# EAGLE board Ploughmeter 3.1 (EAGLE 9.6.2)
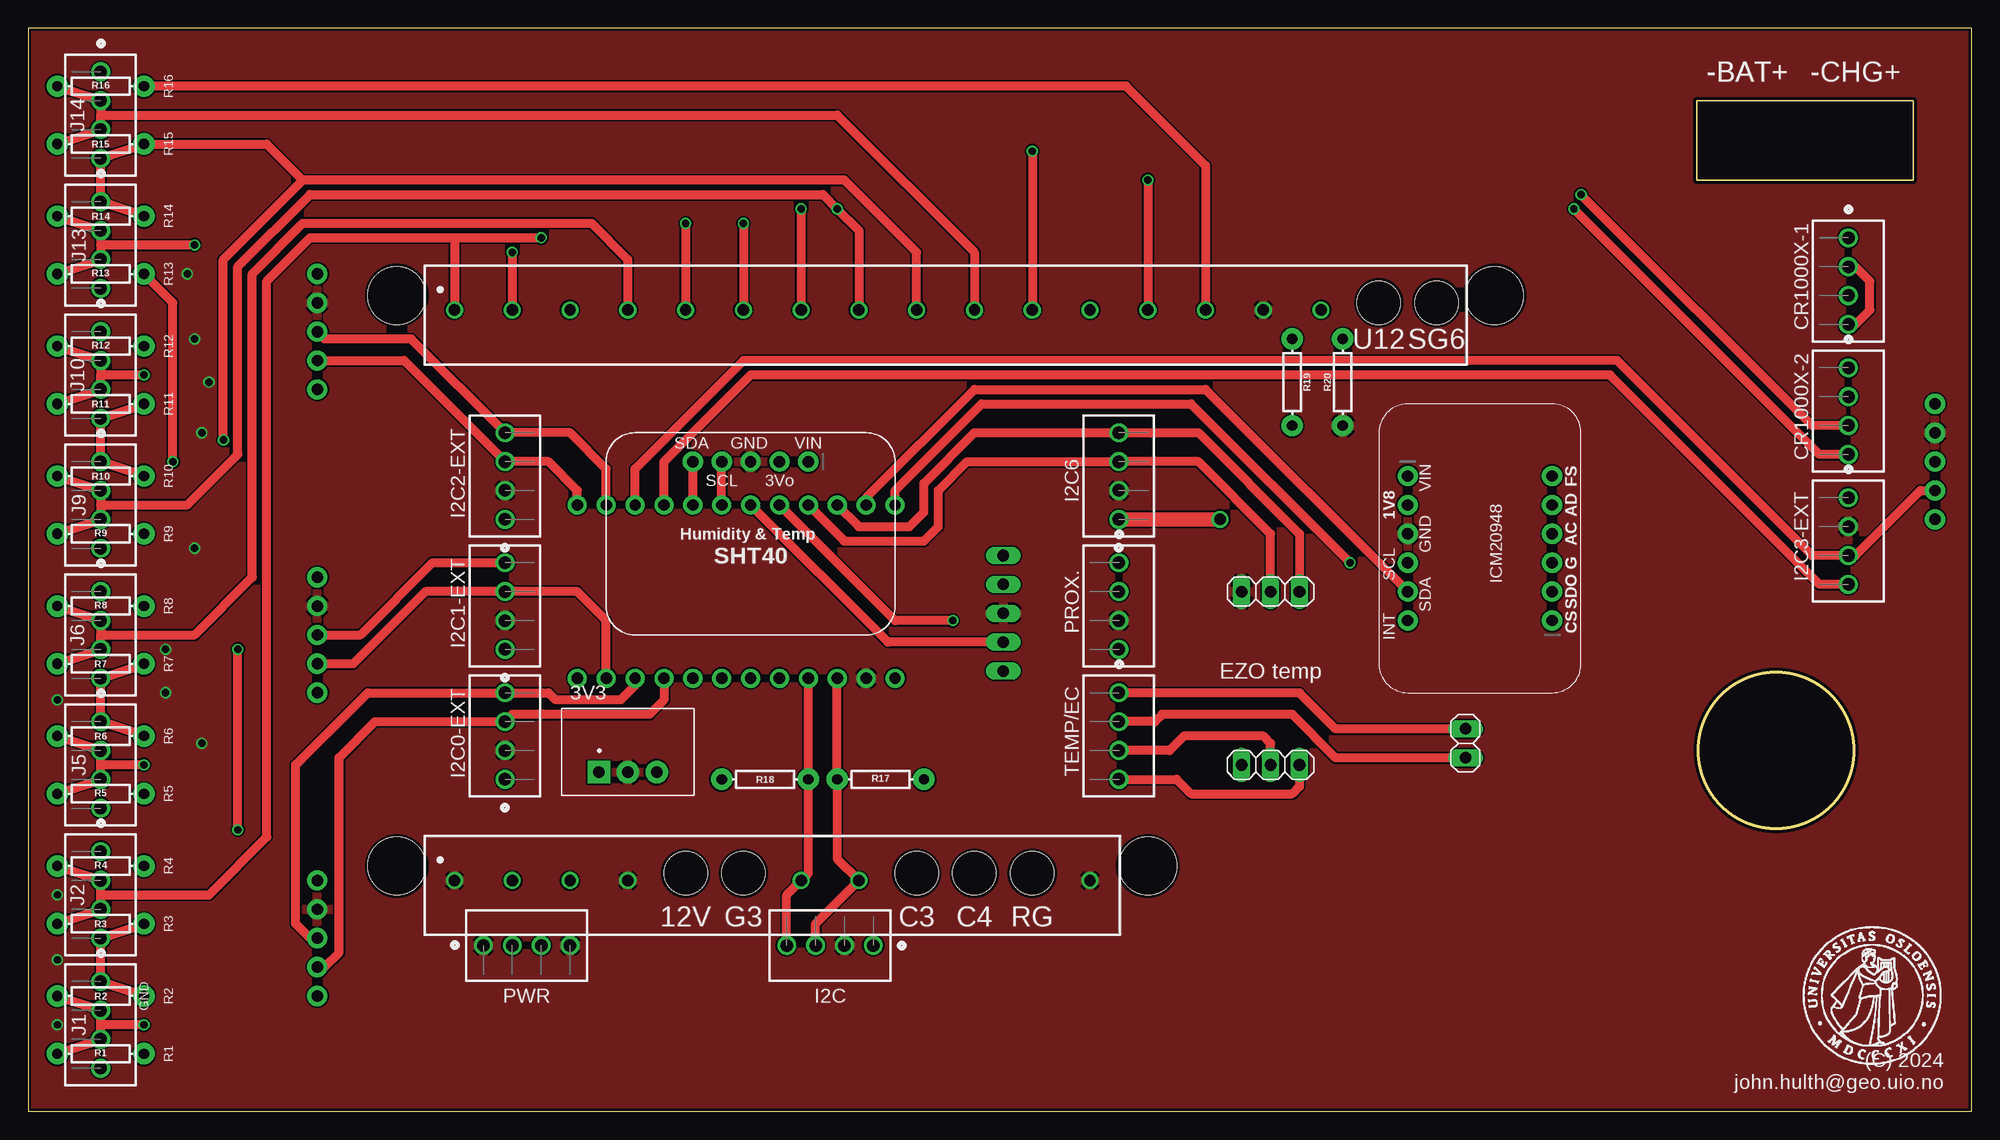
[diagram p0: board, top side]
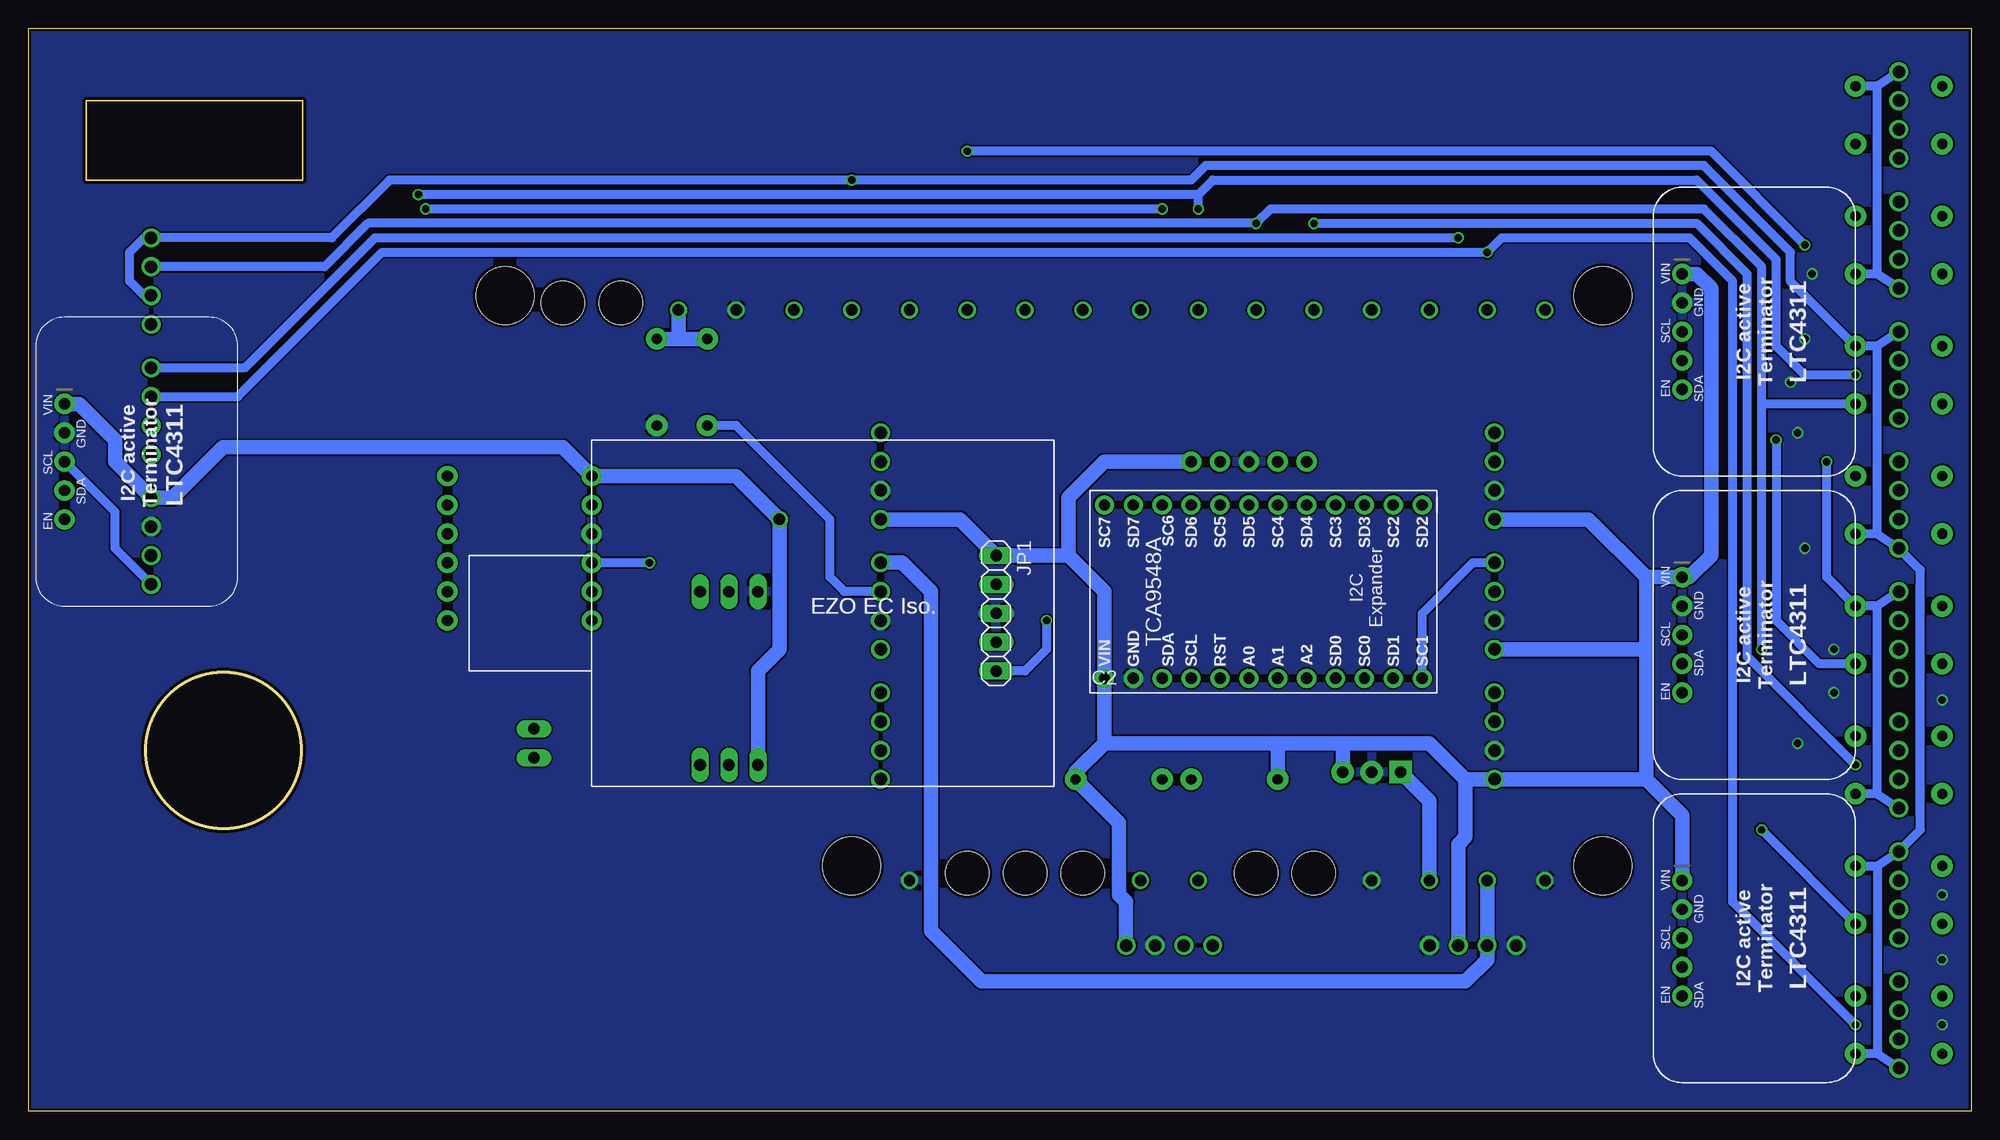
[diagram p1: board, bottom side, seen from below]

Size 170.81 x 95.25 mm. Coordinates in mm from the lower left corner, seen from the top.
Outline: 0,0 170.81,0 170.81,95.25 0,95.25 0,0
Outline: 146.69,88.9 165.74,88.9 165.74,81.92 146.69,81.92 146.69,88.9
Outline: circle at 153.67,31.75 radius 6.86
Copper layers (1*16): Top 0.018mm / dielectric 1.55mm / Bottom 0.018mm
Design rules "eC_2Layer_PClass6_BaseCopperO18_eCDefault": minimum track width 0.15mm, minimum drill 0.35mm, track to track 0.15mm, track to pad 0.15mm, pad to pad 0.15mm, via to via 0.15mm, smd to smd 0mil, copper to edge 0.25mm, drill to drill 0.35mm, minimum pad ring 0.175mm, minimum via ring 0.125mm, stop-mask expansion 0mil, vias tented up to drill 0.45mm, thermal gap 0.2mm
Net classes: 1 highpower: width 0.406 mm, drill 0.483 mm; 2 lowpower: width 0.254 mm, drill 0.483 mm
Holes 3.81 mm at 57.78,20.96 62.86,20.96 78.1,20.96 83.19,20.96 88.27,20.96 123.83,71.12 118.74,71.12
Holes 5.08 mm at 32.38,21.59 98.42,21.59 32.38,71.75 128.91,71.75
tRestrict: area 88.4,-23.2 to 90.4,-21.2

## Footprints (pad centres in the part's own frame; a part is rotated, then mirrored left to right if it is on the bottom)
173010535 = drill 1 pad 2 square: 1 -2.54,0 | drill 1 pad 2: 2 0,0; 3 2.54,0
WURTH_CONNECTORS_WR-TBL-PLUGGABLE-CONNECTOR_691311500018 = drill 1: 1 -43.18,0; 2 -38.1,0; 3 -33.02,0; 4 -27.94,0; 5 -22.86,0; 6 -17.78,0; 7 -12.7,0; 8 -7.62,0; 9 -2.54,0; 10 2.54,0; 11 7.62,0; 12 12.7,0; 13 17.78,0; 14 22.86,0; 15 27.94,0; 16 33.02,0; 17 38.1,0; 18 43.18,0
WURTH_CONNECTORS_WR-TBL-PLUGGABLE-CONNECTOR_691311500012 = drill 1: 1 -27.94,0; 2 -22.86,0; 3 -17.78,0; 4 -12.7,0; 5 -7.62,0; 6 -2.54,0; 7 2.54,0; 8 7.62,0; 9 12.7,0; 10 17.78,0; 11 22.86,0; 12 27.94,0
1725672-4-2.54 = drill 1.1 pad 1.65: 1 0,0; 2 2.54,0; 3 5.08,0; 4 7.62,0
1X05_ROUND_70 = drill 1 pad 1.778: 1 -5.08,0; 2 -2.54,0; 3 0,0; 4 2.54,0; 5 5.08,0
1X05 = drill 1.016 long: 1 -5.08,0; 2 -2.54,0; 3 0,0; 4 2.54,0; 5 5.08,0
1X12_ROUND = drill 1 pad 1.676: 1 -13.97,0; 2 -11.43,0; 3 -8.89,0; 4 -6.35,0; 5 -3.81,0; 6 -1.27,0; 7 1.27,0; 8 3.81,0; 9 6.35,0; 10 8.89,0; 11 11.43,0; 12 13.97,0
1X02 = drill 1.016 long: 1 -1.27,0; 2 1.27,0
1X03 = drill 1.016 long: 1 -2.54,0; 2 0,0; 3 2.54,0
1X06_ROUND_70 = drill 1 pad 1.778: 1 -6.35,0; 2 -3.81,0; 3 -1.27,0; 4 1.27,0; 5 3.81,0; 6 6.35,0
AXIAL-0.3 = drill 0.9 pad 1.88: P$1 -3.81,0; P$2 3.81,0

## Placement (x,y rotation side)
3V3  173010535  [173010535]  52.7,29.84 0 top
C1  [WURTH_CONNECTORS_WR-TBL-PLUGGABLE-CONNECTOR_691311500018]  80.64,70.48 0 top
C2  [WURTH_CONNECTORS_WR-TBL-PLUGGABLE-CONNECTOR_691311500012]  65.41,20.32 0 top
CR1000X-1  1725672  [1725672-4-2.54]  160.02,76.84 270 top
CR1000X-2  1725672  [1725672-4-2.54]  160.02,65.41 270 top
EX0  [1X05_ROUND_70]  25.4,15.24 270 bottom
EX1  [1X05_ROUND_70]  25.4,41.91 270 bottom
EX5  EX2  [1X05_ROUND_70]  25.4,68.58 270 bottom
I2C  1725672  [1725672-4-2.54]  74.29,14.61 180 top
I2C0-EXT  1725672  [1725672-4-2.54]  41.91,29.21 90 top
I2C1-EXT  1725672  [1725672-4-2.54]  41.91,40.64 90 top
I2C2-EXT  1725672  [1725672-4-2.54]  41.91,52.07 90 top
I2C3-EXT  1725672  [1725672-4-2.54]  160.02,53.98 270 top
I2C6  1725672  [1725672-4-2.54]  95.88,52.07 90 top
J1  1725672  [1725672-4-2.54]  6.35,11.43 270 top
J2  1725672  [1725672-4-2.54]  6.35,22.86 270 top
J5  1725672  [1725672-4-2.54]  6.35,34.29 270 top
J6  1725672  [1725672-4-2.54]  6.35,45.72 270 top
J9  1725672  [1725672-4-2.54]  6.35,57.15 270 top
J10  1725672  [1725672-4-2.54]  6.35,68.58 270 top
J13  1725672  [1725672-4-2.54]  6.35,80.01 270 top
J14  1725672  [1725672-4-2.54]  6.35,91.44 270 top
JP1  [1X05]  85.72,43.81 270 bottom
JP2  [1X12_ROUND]  62.23,38.1 0 bottom
JP3  [1X02]  126.36,32.39 270 top
JP4  [1X12_ROUND]  62.23,53.34 180 bottom
JP5  [1X05_ROUND_70]  63.5,57.15 180 top
JP6  [1X03]  109.22,45.72 180 top
JP7  [1X03]  109.22,30.48 0 top
JP9  EX3  [1X05_ROUND_70]  167.64,57.15 270 bottom
JP10  [1X06_ROUND_70]  121.28,49.53 270 top
JP11  [1X06_ROUND_70]  133.99,49.53 90 top
PROX.  1725672  [1725672-4-2.54]  95.88,48.26 270 top
PWR  1725672  [1725672-4-2.54]  40,14.61 0 top
R1  350  [AXIAL-0.3]  6.35,5.08 0 top
R2  350  [AXIAL-0.3]  6.35,10.16 180 top
R3  350  [AXIAL-0.3]  6.35,16.51 180 top
R4  350  [AXIAL-0.3]  6.35,21.59 0 top
R5  350  [AXIAL-0.3]  6.35,27.94 0 top
R6  350  [AXIAL-0.3]  6.35,33.02 180 top
R7  350  [AXIAL-0.3]  6.35,39.37 180 top
R8  350  [AXIAL-0.3]  6.35,44.45 0 top
R9  350  [AXIAL-0.3]  6.35,50.8 0 top
R10  350  [AXIAL-0.3]  6.35,55.88 180 top
R11  350  [AXIAL-0.3]  6.35,62.23 180 top
R12  350  [AXIAL-0.3]  6.35,67.31 0 top
R13  350  [AXIAL-0.3]  6.35,73.66 0 top
R14  350  [AXIAL-0.3]  6.35,78.74 180 top
R15  350  [AXIAL-0.3]  6.35,85.09 180 top
R16  350  [AXIAL-0.3]  6.35,90.17 0 top
R17  10k  [AXIAL-0.3]  74.93,29.21 0 top
R18  10k  [AXIAL-0.3]  64.77,29.21 180 top
R19  2k  [AXIAL-0.3]  111.12,64.13 270 top
R20  1.3k  [AXIAL-0.3]  115.57,64.13 90 top
TEMP/EC  1725672  [1725672-4-2.54]  95.88,36.83 270 top
U$2  [UIO-LOGO-BL]  155.79,3.87 0 top

## Library data of the parts
3V3 = DC-DC Converter; CREATED_BY: PCBLayout.com; DIGIKEY_PARTNO: 732-173010535-ND; MANUFACTURER: Würth Elektronik; MPN: 173010535
C1 = CR6; DATASHEET-URL: https://www.we-online.com/catalog/datasheet/691311500018.pdf; IR-UL: 20A; IR-VDE: 20A; MOUNT: THT; PART-NUMBER: 691311500018; PINS: 18; PITCH: 5.08mm; TYPE: Vertical; WORKING-VOLTAGE-UL: 300V (AC); WORKING-VOLTAGE-VDE: 300V (AC)
C2 = CR6; DATASHEET-URL: https://www.we-online.com/catalog/datasheet/691311500012.pdf; IR-UL: 20A; IR-VDE: 20A; MOUNT: THT; PART-NUMBER: 691311500012; PINS: 12; PITCH: 5.08mm; TYPE: Vertical; WORKING-VOLTAGE-UL: 300V (AC); WORKING-VOLTAGE-VDE: 300V (AC)
CR1000X-1 CR1000X-2 I2C I2C0-EXT I2C1-EXT I2C2-EXT I2C3-EXT I2C6 J1 J2 J5 J6 J9 J10 J13 J14 PROX. PWR TEMP/EC = Backplate_2; ALLIED_NUMBER: 70054337; DESCRIPTION: 4 way vertical PCB terminal,6A 63V Phoenix Contact Non-Fused Terminal Block, 4 Way, Solder Terminals, 26 ??? 20 AWG Through Hole, Nylon, 63 V; HEIGHT: mm; MANUFACTURER_NAME: Phoenix Contact; MANUFACTURER_PART_NUMBER: 1725672; RS_PART_NUMBER: 3924476; RS_PRICE-STOCK: https://uk.rs-online.com/web/p/products/3924476
EX0 EX1 EX5 JP2 JP4 JP5 JP9-JP11 = microbuilder
JP1 JP3 JP6 JP7 = pinhead
R1-R20 = SparkFun-Resistors; PROD_ID: RES-8371
U$2 = UIO-John

## Nets
0SCL: EX0.3 I2C0-EXT.4 JP2.10
0SDA: EX0.4 I2C0-EXT.3 JP2.9
1.8V: JP10.2
1SCL: EX1.3 I2C1-EXT.4 JP2.12
1SDA: EX1.4 I2C1-EXT.3 JP2.11
2SCL: EX5.3 I2C2-EXT.4 JP4.2
2SDA: EX5.4 I2C2-EXT.3 JP4.1
3.3V: JP5.2
3SCL: I2C3-EXT.4 JP4.4 JP9.3
3SDA: I2C3-EXT.3 JP4.3 JP9.4
3V3: 3V3.3 EX0.1 EX1.1 EX5.1 I2C0-EXT.1 I2C1-EXT.1 I2C2-EXT.1 I2C3-EXT.1 I2C6.1 I2C.1 JP1.1 JP2.1 JP5.1 JP7.1 JP9.1 JP10.1 PWR.3 R17.P$2 R18.P$2
4SCL: JP4.6 JP5.4
4SDA: JP4.5 JP5.5
5SCL: JP1.5 JP4.8
5SDA: JP1.4 JP4.7
6SCL: I2C6.4 JP4.10 JP6.1
6SDA: I2C6.3 JP4.9 JP6.2
7SCL: JP4.12 JP10.4
7SDA: JP4.11 JP10.5
12V: C2.5
A0: JP2.6
A1: JP2.7
A2: JP2.8
AUX_SCL: JP11.4
AUX_SDA: JP11.5
C1/SCL: C2.7 I2C.4 JP2.4 R18.P$1
C2/SDA: C2.8 I2C.3 JP2.3 R17.P$1
C3: C2.9
C4: C2.10
CS: JP11.1
EC+: JP3.1 TEMP/EC.1
EC-: JP3.2 TEMP/EC.2
FSYNC: JP11.6
G1: 3V3.2 C1.15 C2.1 C2.4 C2.12 EX0.2 EX1.2 EX5.2 I2C0-EXT.2 I2C1-EXT.2 I2C2-EXT.2 I2C3-EXT.2 I2C6.2 I2C.2 JP1.3 JP2.2 JP5.3 JP6.3 JP9.2 JP10.3 PROX..3 PWR.1 PWR.4 R20.P$1
G3: C2.6
GND: JP11.3
INT: JP10.6
OFF: JP1.2
PROX+: PROX..2 R19.P$2
RESET: JP2.5
RG: C2.11
SDO/ADR: JP11.2
SG1: C1.3
SG2: C1.6 CR1000X-1.2 CR1000X-1.4 J1.1 J2.4 J9.1 J10.4 R2.P$1 R3.P$1 R10.P$1 R11.P$1
SG3: C1.9 J5.1 J6.4 J13.1 J14.4 R6.P$1 R7.P$1 R14.P$1 R15.P$1
SG4: C1.12
SG6: C1.18
SW12-1: C2.2 PROX..1 PWR.2
SW12-2: 3V3.1 C2.3
T+: JP7.2 TEMP/EC.3
T-: JP7.3 TEMP/EC.4
U1: C1.1 CR1000X-2.1 J2.2 J2.3 R3.P$2 R4.P$1
U2: C1.2 CR1000X-2.2 J1.2 J1.3 R1.P$1 R2.P$2
U3: C1.4 J6.2 J6.3 R7.P$2 R8.P$1
U4: C1.5 J5.2 J5.3 R5.P$1 R6.P$2
U5: C1.7 CR1000X-2.3 J10.2 J10.3 R11.P$2 R12.P$1
U6: C1.8 CR1000X-2.4 J9.2 J9.3 R9.P$1 R10.P$2
U7: C1.10 J14.2 J14.3 R15.P$2 R16.P$1
U8: C1.11 J13.2 J13.3 R13.P$1 R14.P$2
U9: C1.13 CR1000X-1.1 CR1000X-1.3 J1.4 J2.1 J9.4 J10.1 R1.P$2 R4.P$2 R9.P$2 R12.P$2
U10: C1.14 J5.4 J6.1 J13.4 J14.1 R5.P$2 R8.P$2 R13.P$2 R16.P$2
U11: C1.16 R19.P$1 R20.P$2
U12: C1.17

## Tracks (layer width: path | path; a pad name or v marks a point on that pad's centre or on a via)
0SCL
  Top 0.813: JP2.10 53.34,37.47 52.07,36.2 46.35,36.2 45.72,36.83 I2C0-EXT.4 29.84,36.83 23.49,30.48 23.49,16.51 24.76,15.24 EX0.3
0SDA
  Top 0.813: JP2.9 55.88,36.2 54.61,34.92 42.54,34.92 I2C0-EXT.3 30.48,34.29 27.3,31.12 27.3,13.97 26.03,12.7 EX0.4
1SCL
  Top 0.813: EX1.3 29.21,41.91 35.56,48.26 I2C1-EXT.4
  Bottom 0.813: JP2.12 48.26,43.81 43.81,48.26 I2C1-EXT.4
1SDA
  Top 0.813: EX1.4 28.57,39.37 34.92,45.72 I2C1-EXT.3 48.26,45.72 50.8,43.18 JP2.11
2SCL
  Top 0.813: EX5.3 26.03,67.94 33.65,67.94 I2C2-EXT.4 47.62,59.69 50.8,56.52 JP4.2
2SDA
  Top 0.813: EX5.4 33.02,66.04 I2C2-EXT.3 45.72,57.15 48.26,54.61 JP4.1
3SCL
  Top 0.813: JP4.4 55.88,57.15 63.5,64.77 139.06,64.77 157.48,46.36 I2C3-EXT.4
  Bottom 0.813: I2C3-EXT.4 163.19,49.53 163.19,52.7 JP9.3
3SDA
  Top 0.813: JP4.3 53.34,56.52 62.86,66.04 139.7,66.04 156.84,48.89 I2C3-EXT.3 160.66,48.89 166.37,54.61 JP9.4
3V3  (via drill 1)
  Top 1.27: v104.77,52.07 I2C6.1
  Bottom 1.27: 28.57,29.21 28.57,40.64 | 28.57,40.64 28.57,46.99 | 28.57,46.99 EX1.1 24.76,46.99 22.86,48.89 22.86,72.39 24.13,73.66 EX5.1 | 28.57,29.21 I2C0-EXT.1 44.45,29.21 | I2C1-EXT.1 28.57,40.64 | 55.24,32.39 60.96,32.39 | 60.96,32.39 76.2,32.39 | 76.2,32.39 JP2.1 76.2,45.72 79.38,48.89 | 76.2,32.39 78.74,29.84 R17.P$2 74.93,25.4 74.93,19.05 74.29,18.42 I2C.1 | 79.38,48.89 JP1.1 88.9,52.07 I2C6.1 | 79.38,48.89 79.38,53.98 76.2,57.15 JP5.1 | JP9.1 166.37,62.23 163.19,59.05 163.19,57.15 I2C3-EXT.1 158.12,53.98 153.67,58.42 123.83,58.42 JP10.1 108.58,55.88 v104.77,52.07 104.77,40.64 106.68,38.73 JP7.1 | EX0.1 25.4,26.04 28.57,29.21 | 28.57,46.99 33.65,52.07 I2C2-EXT.1 | 44.45,29.21 47.62,32.39 55.24,32.39 | 3V3.3 55.24,32.39 | R18.P$2 60.96,32.39 | 44.45,29.21 44.45,24.13 45.08,23.5 PWR.3
4SCL
  Top 0.813: JP4.6 JP5.4
4SDA
  Top 0.813: JP4.5 JP5.5
5SCL  (via drill 0.65)
  Top 0.813: JP4.8 76.2,43.18 v81.28,43.18
  Bottom 0.813: v81.28,43.18 81.28,40.64 83.19,38.73 JP1.5
5SDA
  Top 0.813: JP1.4 75.56,41.28 JP4.7
6SCL
  Top 0.813: JP6.1 111.76,50.8 102.87,59.69 I2C6.4 83.19,59.69 78.74,55.25 78.74,52.7 77.47,51.44 73.03,51.44 JP4.10
6SDA
  Top 0.813: JP6.2 109.22,50.8 102.87,57.15 I2C6.3 82.55,57.15 80.01,54.61 80.01,51.44 78.74,50.16 71.75,50.16 JP4.9
7SCL  (via drill 0.65)
  Top 0.813: JP4.12 76.2,54.61 83.82,62.23 102.23,62.23 v116.2,48.26
  Bottom 0.813: JP10.4 v116.2,48.26
7SDA
  Top 0.813: JP4.11 73.66,53.98 83.19,63.5 103.5,63.5 JP10.5
C1/SCL
  Top 0.813: JP2.4 R18.P$1 68.58,20.96 C2.7 66.67,19.05 I2C.4
C2/SDA
  Top 0.813: JP2.3 R17.P$1 71.12,22.23 C2.8 69.22,16.51 I2C.3
EC+
  Top 0.813: TEMP/EC.1 111.76,36.83 114.94,33.66 JP3.1
EC-
  Top 0.813: TEMP/EC.2 99.06,34.29 99.69,34.92 111.12,34.92 114.94,31.12 JP3.2
G1  (via drill 0.65)
  other vias: 13.97,73.66 14.6,67.94 15.24,59.69 15.87,64.13 14.6,49.53 12.06,40.64 12.06,36.83 15.24,32.39 2.54,13.34 2.54,19.05 2.54,7.62 2.54,36.2
  pour Top: -1.27,-2.54 -1.27,97.79 173.36,97.79 173.36,-2.54
  pour Bottom: 0,-1.27 0,96.52 172.08,96.52 172.08,-1.27
PROX+
  Bottom 0.813: PROX..2 99.06,45.72 100.33,46.99 100.33,52.07 108.58,60.33 R19.P$2
SG2  (via drill 0.65)
  Top 0.813: R2.P$1 J1.1 J2.4 R3.P$1 | R10.P$1 J9.1 J10.4 R11.P$1 | v18.41,24.77 v18.41,40.64 | v62.86,78.11 C1.6 | CR1000X-1.4 160.66,69.22 161.93,70.48 161.93,73.03 160.66,74.3 CR1000X-1.2
  Bottom 0.813: v18.41,40.64 18.41,62.23 | v18.41,24.77 R3.P$1 | R11.P$1 18.41,62.23 | 18.41,62.23 18.41,74.3 23.49,79.38 61.59,79.38 v62.86,78.11 140.97,78.11 144.78,74.3 CR1000X-1.2
SG3  (via drill 0.65)
  Top 0.813: R6.P$1 J5.1 J6.4 R7.P$1 | R14.P$1 J13.1 J14.4 R15.P$1 20.95,85.09 24.13,81.92 | v17.14,59.05 17.14,74.93 24.13,81.92 | C1.9 78.1,75.56 71.75,81.92 24.13,81.92
  Bottom 0.813: R7.P$1 13.33,39.37 17.14,43.18 v17.14,59.05
SW12-1
  Bottom 1.27: PROX..1 93.98,48.26 91.44,45.72 91.44,15.88 87,11.43 44.45,11.43 42.54,13.34 PWR.2 C2.2
SW12-2
  Bottom 1.27: C2.3 47.62,27.3 3V3.1
T+
  Top 0.813: JP7.2 109.22,32.39 108.58,33.02 101.6,33.02 100.33,31.75 TEMP/EC.3
T-
  Top 0.813: JP7.3 111.76,28.58 111.12,27.94 102.23,27.94 100.97,29.21 TEMP/EC.4
U1  (via drill 0.65)
  Top 0.813: R4.P$1 J2.2 6.35,19.05 | R3.P$2 J2.3 6.35,19.05 | 37.46,76.84 24.76,76.84 20.95,73.03 20.95,24.13 15.87,19.05 6.35,19.05 | 37.46,76.84 C1.1 | 37.46,76.84 v45.08,76.84
  Bottom 0.813: CR1000X-2.1 151.76,65.41 140.33,76.84 v45.08,76.84
U2  (via drill 0.65)
  Top 0.813: R1.P$1 J1.3 6.35,7.62 | R2.P$2 J1.2 6.35,7.62 | v10.16,7.62 6.35,7.62 | v42.54,75.56 C1.2
  Bottom 0.813: v10.16,7.62 20.95,18.42 20.95,73.03 24.76,76.84 41.27,76.84 v42.54,75.56 139.7,75.56 152.4,62.87 CR1000X-2.2
U3
  Top 0.813: R7.P$2 J6.3 6.35,41.91 | R8.P$1 J6.2 6.35,41.91 | C1.4 52.7,74.93 49.53,78.11 24.13,78.11 19.68,73.66 19.68,46.99 14.6,41.91 6.35,41.91
U4  (via drill 0.65)
  Top 0.813: R5.P$1 J5.3 6.35,30.48 | R6.P$2 J5.2 6.35,30.48 | v10.16,30.48 6.35,30.48 | v57.78,78.11 C1.5
  Bottom 0.813: v10.16,30.48 19.68,40.01 19.68,73.66 24.13,78.11 v57.78,78.11
U5  (via drill 0.65)
  Top 0.813: R11.P$2 J10.3 6.35,64.77 | R12.P$1 J10.2 6.35,64.77 | v10.16,64.77 6.35,64.77 | v67.94,79.38 C1.7 | CR1000X-2.3 156.84,60.33 v136.52,80.65
  Bottom 0.813: v10.16,64.77 14.6,64.77 17.14,67.31 17.14,74.93 24.13,81.92 66.67,81.92 67.94,80.65 | v67.94,79.38 67.94,80.65 | 67.94,80.65 v136.52,80.65
U6  (via drill 0.65)
  Top 0.813: R9.P$1 J9.3 6.35,53.34 | R10.P$2 J9.2 6.35,53.34 | C1.8 73.03,77.47 v71.12,79.38 69.85,80.65 24.76,80.65 18.41,74.3 18.41,57.79 13.97,53.34 6.35,53.34 | CR1000X-2.4 157.48,57.79 v135.89,79.38
  Bottom 0.813: v71.12,79.38 v135.89,79.38
U7
  Top 0.813: R15.P$2 J14.3 6.35,87.63 | R16.P$1 J14.2 6.35,87.63 | C1.10 83.19,75.56 71.12,87.63 6.35,87.63
U8  (via drill 0.65)
  Top 0.813: R13.P$1 J13.3 6.35,76.2 | R14.P$2 J13.2 6.35,76.2 | v14.6,76.2 6.35,76.2 | v88.27,84.45 C1.11
  Bottom 0.813: v14.6,76.2 22.86,84.45 v88.27,84.45
U9  (via drill 0.65)
  Top 0.813: v98.42,81.92 C1.13
  Bottom 0.813: 8.25,50.8 J9.4 4.44,47.62 4.44,24.77 J2.1 8.25,21.59 | 8.25,50.8 R9.P$2 | 8.25,50.8 8.25,67.31 | 8.25,67.31 R12.P$2 15.87,73.03 15.87,75.56 23.49,83.19 67.31,83.19 68.58,81.92 v98.42,81.92 139.06,81.92 144.14,76.84 CR1000X-1.1 160.66,76.84 161.93,75.56 161.93,73.03 160.66,71.75 CR1000X-1.3 | 8.25,67.31 J10.1 | R4.P$2 8.25,21.59 | 8.25,21.59 8.25,5.08 | 8.25,5.08 R1.P$2 | 8.25,5.08 J1.4
U10  (via drill 0.65)
  Top 0.813: C1.14 103.5,83.19 96.52,90.17 R16.P$2 | v12.7,57.15 12.7,71.12 R13.P$2
  Bottom 0.813: J13.4 8.25,73.66 | 8.25,73.66 R13.P$2 | 8.25,73.66 8.25,90.17 | 8.25,90.17 R16.P$2 | 8.25,90.17 J14.1 | J5.4 8.25,27.94 | 8.25,27.94 R5.P$2 | 8.25,27.94 8.25,44.45 | 8.25,44.45 R8.P$2 12.7,46.99 v12.7,57.15 | 8.25,44.45 J6.1
U11
  Bottom 1.27: R19.P$1 113.66,67.94 | 113.66,67.94 R20.P$2 | 113.66,67.94 C1.16

## Text on the board
tPlace: -BAT+ | -BAT+ | -CHG+ | R16 | R15 | R14 | R13 | R12 | U12 | SG6 | R11 | SDA | GND | VIN | R10 | SCL | 3Vo | VIN | FS | 1V8 | AD | R9 | Humidity & Temp | GND | AC | ICM20948 | SHT40 | SCL | G | SDA | SDO | R8 | INT | CS | R7 | EZO temp | R6 | R5 | R4 | R3 | 12V | G3 | C3 | C4 | RG | GND | R2 | R1 | (C) 2024 / john.hulth@geo.uio.no
bPlace: VIN | GND | LTC4311 | I2C active / Terminator | SCL | SDA | EN | VIN | GND | LTC4311 | I2C active / Terminator | SCL | SDA | SD2 | SC2 | SD3 | SC3 | SD4 | SC4 | SD5 | SC5 | SD6 | SC6 | SD7 | SC7 | EN | VIN | I2C / Expander | TCA9548A | GND | EZO EC Iso. | EZO EC Iso. | LTC4311 | I2C active / Terminator | SCL | SDA | SC1 | SD1 | SC0 | SD0 | A2 | A1 | A0 | RST | SCL | SDA | GND | VIN | EN | VIN | GND | SCL | LTC4311 | I2C active / Terminator | EN | SDA